# EAGLE board Hackaton SIDS Robot (EAGLE 9.7.0)

Size 283.06 x 157.93 mm. Coordinates in mm from the lower left corner, seen from the top.
Outline: 0,0 283.06,0 283.06,157.93 0,157.93 0,0
Copper layers (1*16): Top 0.035mm / dielectric 1.5mm / Bottom 0.035mm
Design rules "default": minimum track width 6mil, minimum drill 0.35mm, track to track 6mil, track to pad 6mil, pad to pad 6mil, via to via 6mil, smd to smd 6mil, copper to edge 40mil, drill to drill 6mil, minimum pad ring 10mil, minimum via ring 8mil, stop-mask expansion 4mil, vias tented up to drill 0mil, thermal gap 10mil

## Footprints (pad centres in the part's own frame; a part is rotated, then mirrored left to right if it is on the bottom)
LEDRD254W60D565H860B = drill 0.981 pad 1.581: 1 -1.27,0; 2 1.27,0
LEDRD254W60D565H860B_B = drill 0.981 pad 1.581: 1 -1.27,0; 2 1.27,0
HC-SR04 = drill 1.016 long: 1 -3.81,0; 2 -1.27,0; 3 1.27,0; 4 3.81,0
PIEZO = drill 1 pad 1.6: 1 -3.5,0; 2 3.5,0
RESAD1016W63L850D250B = drill 0.83 pad 1.43: 1 -5.08,0; 2 5.08,0
SWITCH-MOMENTARY-PTH-6.5MM = drill 1.016 pad 1.88: 1 -3.251,2.261; 2 3.251,2.261; 3 -3.251,-2.261; 4 3.251,-2.261
ARDUINO-UNO-R3-SHIELD = drill 1.016 pad 1.88: 3.3V 24.13,-2.54; 5V 24.13,0; A0 24.13,12.7; A1 24.13,15.24; A2 24.13,17.78; A3 24.13,20.32; A4 24.13,22.86; A5 24.13,25.4; AREF -24.13,-13.97; D2 -24.13,20.32; D3 -24.13,17.78; D4 -24.13,15.24; D5 -24.13,12.7; D6 -24.13,10.16; D7 -24.13,7.62; D8 -24.13,3.81; D9 -24.13,1.27; D10 -24.13,-1.27; D11 -24.13,-3.81; D12 -24.13,-6.35; D13 -24.13,-8.89; GND@0 24.13,2.54; GND@1 24.13,5.08; GND@2 -24.13,-11.43; IOREF 24.13,-7.62; NC 24.13,-10.16; RES 24.13,-5.08; RX -24.13,25.4; SCL -24.13,-19.05; SDA -24.13,-16.51; TX -24.13,22.86; VIN 24.13,7.62
JHD-162A = drill 1.016 long: 1 -19.05,0; 2 -16.51,0; 3 -13.97,0; 4 -11.43,0; 5 -8.89,0; 6 -6.35,0; 7 -3.81,0; 8 -1.27,0; 9 1.27,0; 10 3.81,0; 11 6.35,0; 12 8.89,0; 13 11.43,0; 14 13.97,0; 15 16.51,0; 16 19.05,0
TO92 = drill 0.813 octagon: 1 -1.27,0; 2 0,1.905; 3 1.27,0

## Placement (x,y rotation side)
D1  RED  [LEDRD254W60D565H860B]  202.17,35.68 180 top
D2  BLUE  [LEDRD254W60D565H860B_B]  209.79,35.68 180 top
DIST1  DISTANCE-SENSOR-4PINHC-SR04  [HC-SR04]  109.27,150.31 0 top
DIST2  DISTANCE-SENSOR-4PINHC-SR04  [HC-SR04]  157.53,150.31 0 top
PIEZO1  PIEZO  [PIEZO]  269.48,44.57 270 top
R1  1k  [RESAD1016W63L850D250B]  264.4,25.52 90 top
R2  1k  [RESAD1016W63L850D250B]  208.52,28.06 90 top
R3  1k  [RESAD1016W63L850D250B]  228.84,61.08 90 top
R4  1k  [RESAD1016W63L850D250B]  223.76,28.06 90 top
R5  1k  [RESAD1016W63L850D250B]  131.81,61.9 90 top
R6  1k  [RESAD1016W63L850D250B]  200.9,28.06 90 top
R7  1k  [RESAD1016W63L850D250B]  244.08,28.06 90 top
R8  1k  [RESAD1016W63L850D250B]  101.33,64.44 90 top
R9  1k  [RESAD1016W63L850D250B]  254.24,28.06 90 top
R10  1k  [RESAD1016W63L850D250B]  269.48,63.62 90 top
S1  SWITCH_MOMENTARY  [SWITCH-MOMENTARY-PTH-6.5MM]  261.86,44.57 90 top
U1  ARDUINO-UNO-R3-SHIELD  [ARDUINO-UNO-R3-SHIELD]  47.88,69.65 270 top
U2  LCD-16X2JHD-162A  [JHD-162A]  115.3,36.63 0 top
U3  TMP36GT9Z_TO92  [TO92]  251.7,40.76 0 top
U4  TMP36GT9Z_TO92  [TO92]  231.38,53.46 180 top
U5  TMP36GT9Z_TO92  [TO92]  221.22,35.68 0 top
U6  TMP36GT9Z_TO92  [TO92]  241.54,35.68 0 top

## Library data of the parts
D1 = Tinkercad; CATEGORY: Opto-Electronic; SUB-CATEGORY: LED; VALUE: LED_RED
D2 = Tinkercad; CATEGORY: Opto-Electronic; SUB-CATEGORY: LED; VALUE: LED_BLUE
DIST1 DIST2 PIEZO1 R1-R10 S1 U1-U6 = Tinkercad

## Nets
D1_C: D1.2 R6.2
D2_C: D2.2 R2.2
PIEZO1_1: PIEZO1.1 R10.1
U1_5V: DIST1.1 DIST2.1 R1.1 R3.2 R5.2 U1.5V U2.2 U3.3 U5.3 U6.3
U1_A0: PIEZO1.2 U1.A0
U1_A1: D1.1 U1.A1
U1_A2: D2.1 U1.A2
U1_A3: U1.A3 U5.2
U1_A4: U1.A4 U6.2
U1_A5: U1.A5 U3.2
U1_D2: R1.2 S1.3 S1.4 U1.D2
U1_D3: U1.D3 U4.2
U1_D4: DIST2.3 U1.D4
U1_D5: DIST2.2 U1.D5
U1_D6: DIST1.3 U1.D6
U1_D7: DIST1.2 U1.D7
U1_D8: U1.D8 U2.14
U1_D9: U1.D9 U2.13
U1_D10: U1.D10 U2.12
U1_D11: U1.D11 U2.11
U1_D12: U1.D12 U2.6
U1_D13: U1.D13 U2.4
U1_GND: DIST1.4 DIST2.4 R2.1 R4.1 R6.1 R7.1 R8.2 R9.1 R10.2 S1.1 S1.2 U1.GND@0 U1.GND@1 U1.GND@2 U2.1 U2.5 U2.16 U4.3
U2_LED+: R5.1 U2.15
U2_VO: R8.1 U2.3
U3_GND: R9.2 U3.1
U4_GND: R3.1 U4.1
U5_GND: R4.2 U5.1
U6_GND: R7.2 U6.1

## Tracks (layer width: path | path; a pad name or v marks a point on that pad's centre or on a via)
D1_C  (1 unrouted)
D2_C  (1 unrouted)
PIEZO1_1  (1 unrouted)
U1_5V  (9 unrouted)
U1_A0  (1 unrouted)
U1_A1  (1 unrouted)
U1_A2  (1 unrouted)
U1_A3  (1 unrouted)
U1_A4  (1 unrouted)
U1_A5  (1 unrouted)
U1_D2  (3 unrouted)
U1_D3  (1 unrouted)
U1_D4  (1 unrouted)
U1_D5  (1 unrouted)
U1_D6  (1 unrouted)
U1_D7  (1 unrouted)
U1_D8  (1 unrouted)
U1_D9  (1 unrouted)
U1_D10  (1 unrouted)
U1_D11  (1 unrouted)
U1_D12  (1 unrouted)
U1_D13  (1 unrouted)
U1_GND  (17 unrouted)
U2_LED+  (1 unrouted)
U2_VO  (1 unrouted)
U3_GND  (1 unrouted)
U4_GND  (1 unrouted)
U5_GND  (1 unrouted)
U6_GND  (1 unrouted)